# EAGLE board furby (EAGLE 6.3)
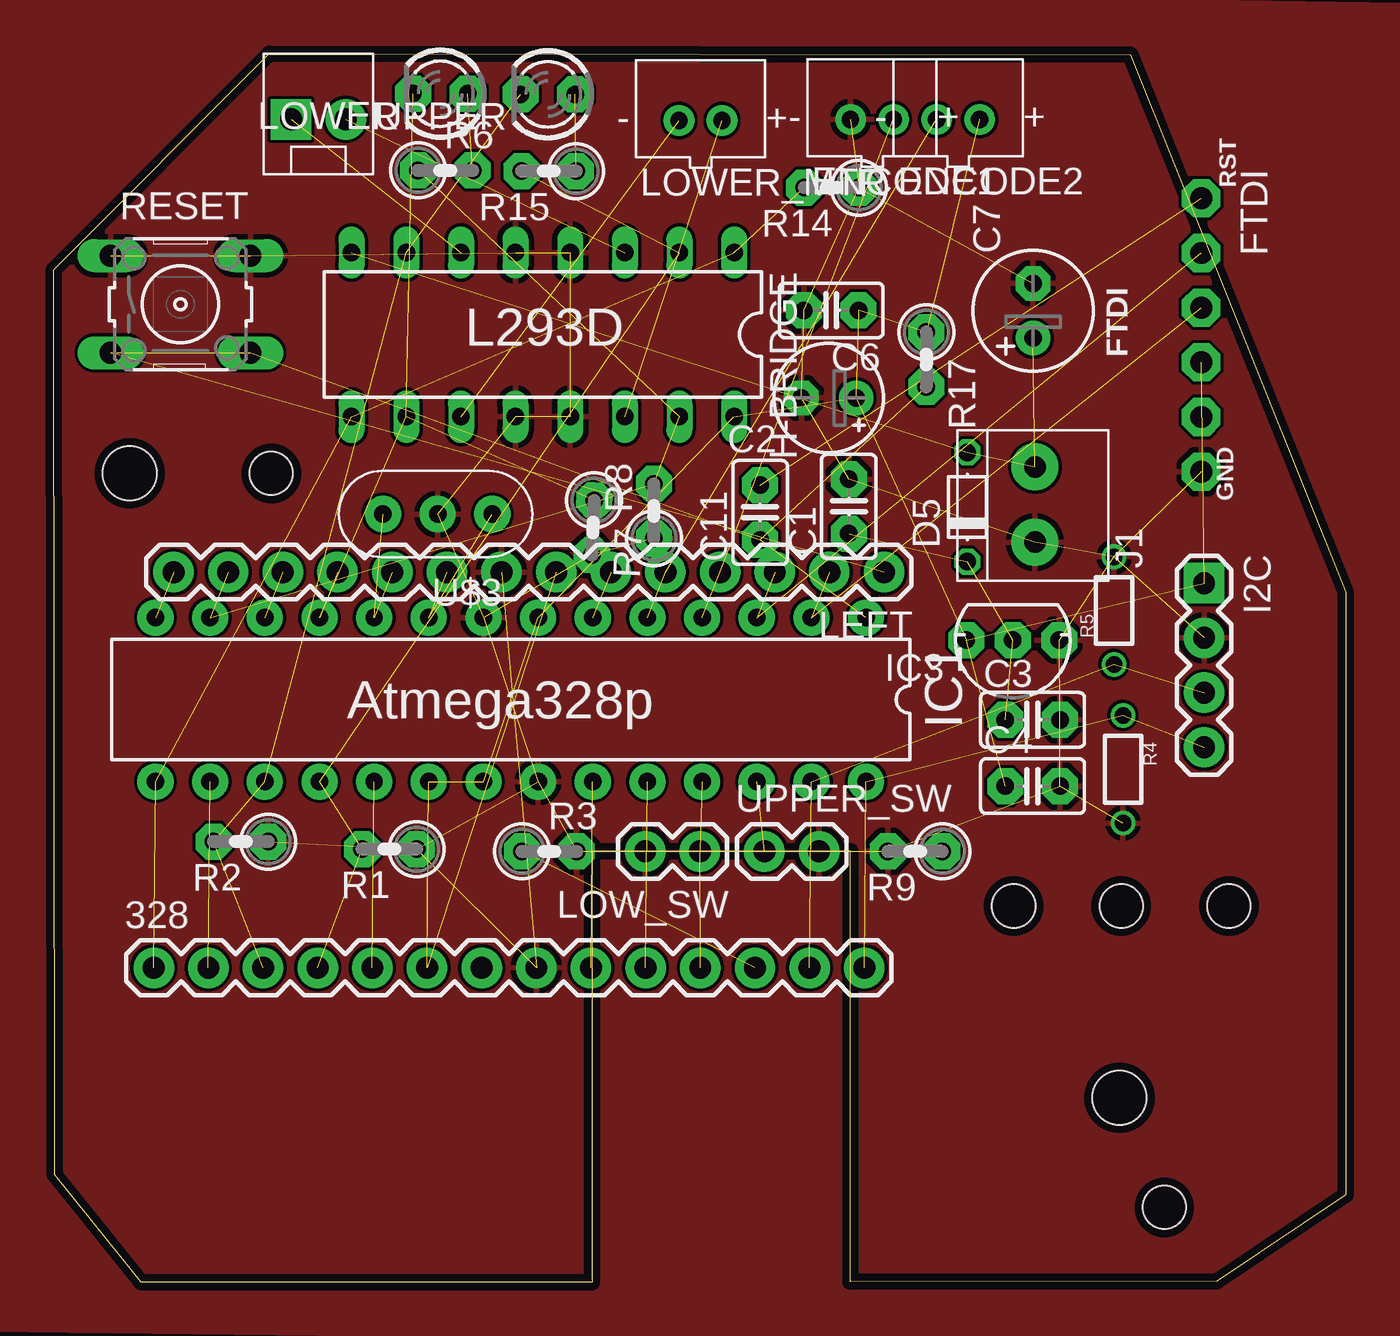
[diagram p0: board, top side]
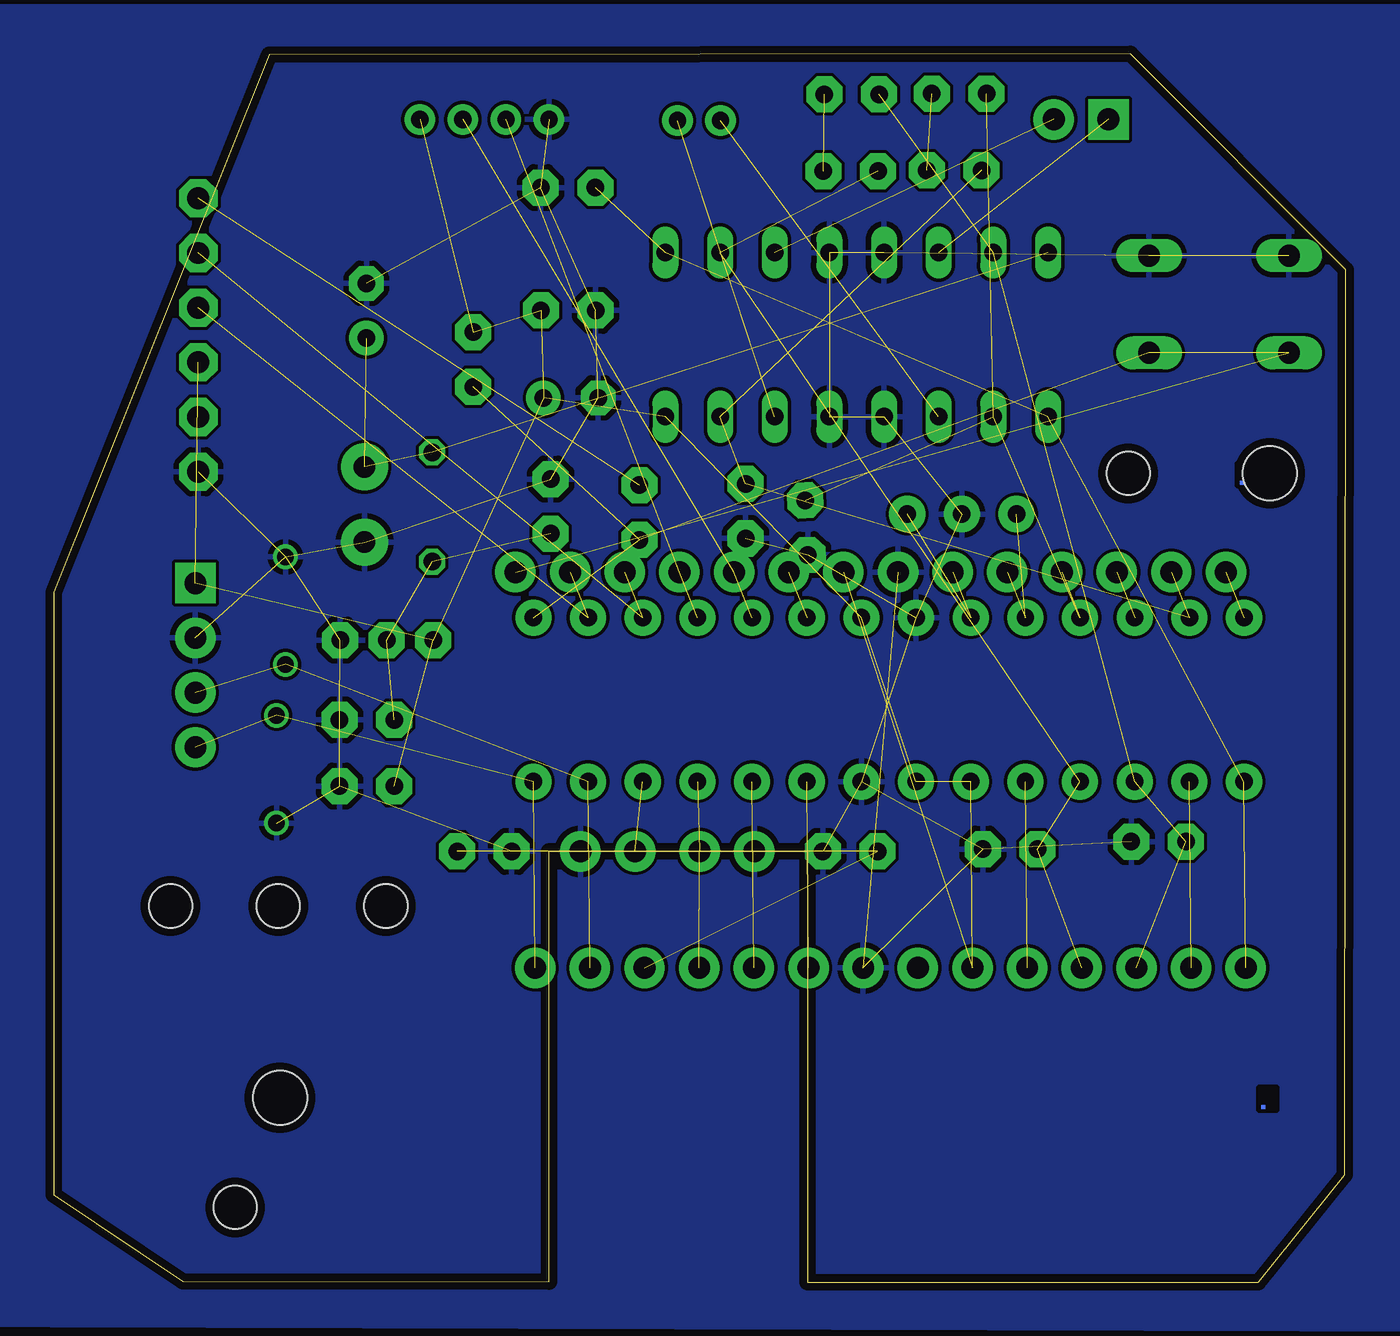
[diagram p1: board, bottom side, seen from below]

Size 60.03 x 57.06 mm. Coordinates in mm from the lower left corner, seen from the top.
Outline: 10.01,57.06 0,47.03 0.05,4.98 4.05,0 25.01,0 25.02,20.01 37.02,20.01 37.02,0.01 54.03,0.05 60.03,4.05 60.03,32.04 50.03,57.01 10,57.05
Copper layers (1*16): Top 0.0356mm / dielectric 1.5011mm / Bottom 0.0356mm
Design rules "LaenPCBOrder": minimum track width 6mil, minimum drill 13mil, track to track 6mil, track to pad 6mil, pad to pad 6mil, via to via 6mil, smd to smd 6mil, copper to edge 15mil, drill to drill 6mil, minimum pad ring 7mil, minimum via ring 7mil, stop-mask expansion 4mil, vias tented up to drill 0mil, thermal gap 10mil
Net classes: 1 power: width 0.61 mm
Holes 3.2 mm at 45.44,63.09 40.12,62.42
Holes 2 mm at 10.11,37.57 51.61,3.47 49.61,17.47 54.61,17.47 44.61,17.47
Holes 2.5 mm at 3.52,37.57 49.52,8.57

## Footprints (pad centres in the part's own frame; a part is rotated, then mirrored left to right if it is on the bottom)
1X14 = drill 1.016 pad 1.88: 1 0,0; 2 2.54,0; 3 5.08,0; 4 7.62,0; 5 10.16,0; 6 12.7,0; 7 15.24,0; 8 17.78,0; 9 20.32,0; 10 22.86,0; 11 25.4,0; 12 27.94,0; 13 30.48,0; 14 33.02,0
C025-025X050 = drill 0.813 pad 1.676 octagon: 1 -1.27,0; 2 1.27,0
E2,5-5 = drill 0.813 pad 1.6: + -1.27,0 | drill 0.813 pad 1.6 octagon: - 1.27,0
E2,5-6 = drill 0.813 pad 1.6: + -1.27,0 | drill 0.813 pad 1.6 octagon: - 1.27,0
D-5 = drill 0.813 octagon: A 2.54,0; C -2.54,0
JST-PH-2-THM = drill 0.8 pad 1.422: 1 1,0; 2 -1,0
1X06-CLEANBIG = drill 1.016 pad 1.778 octagon: 1 -6.35,0; 2 -3.81,0; 3 -1.27,0; 4 1.27,0; 5 3.81,0; 6 6.35,0
DIL16 = drill 0.813 long: 1 -8.89,-3.81; 2 -6.35,-3.81; 3 -3.81,-3.81; 4 -1.27,-3.81; 5 1.27,-3.81; 6 3.81,-3.81; 7 6.35,-3.81; 8 8.89,-3.81; 9 8.89,3.81; 10 6.35,3.81; 11 3.81,3.81; 12 1.27,3.81; 13 -1.27,3.81; 14 -3.81,3.81; 15 -6.35,3.81; 16 -8.89,3.81
1X04 = drill 1.016 pad 1.88 square: 1 0,0 | drill 1.016 pad 1.88: 2 2.54,0; 3 5.08,0; 4 7.62,0
DIL28-3-ROUND = drill 0.813 pad 1.676: 1 -16.51,-3.81; 2 -13.97,-3.81; 3 -11.43,-3.81; 4 -8.89,-3.81; 5 -6.35,-3.81; 6 -3.81,-3.81; 7 -1.27,-3.81; 8 1.27,-3.81; 9 3.81,-3.81; 10 6.35,-3.81; 11 8.89,-3.81; 12 11.43,-3.81; 13 13.97,-3.81; 14 16.51,-3.81; 15 16.51,3.81; 16 13.97,3.81; 17 11.43,3.81; 18 8.89,3.81; 19 6.35,3.81; 20 3.81,3.81; 21 1.27,3.81; 22 -1.27,3.81; 23 -3.81,3.81; 24 -6.35,3.81; 25 -8.89,3.81; 26 -11.43,3.81; 27 -13.97,3.81; 28 -16.51,3.81
TO92-INLINE = drill 0.813 pad 1.676 octagon: 1 -2.159,0; 2 0,0; 3 2.159,0
1X2-3.5MM = drill 1 pad 2.184: 1 1.8,0; 2 -1.7,0
1X02 = drill 1.016 pad 1.88: 1 0,0; 2 2.54,0
LED3MM = drill 0.813 pad 1.676 octagon: A -1.27,0; K 1.27,0
0207/2V = drill 0.813 pad 1.676 octagon: 1 -1.27,0; 2 1.27,0
1/6W-RES = drill 0.762: 1 -2.5,0; 2 2.5,0
B3F-10XX = drill 1.016 long: 1 -3.251,2.261; 2 3.251,2.261; 3 -3.251,-2.261; 4 3.251,-2.261
CERM_OSC = drill 0.813 pad 1.676: P$1 -2.54,0; P$2 0,0; P$3 2.54,0
MOLEX-1X2 = drill 1.016 pad 1.88 square: 1 0,0 | drill 1.016 pad 1.88: 2 2.54,0

## Placement (x,y rotation side)
328  M14  [1X14]  4.64,14.6 0 top
C1  0.1uF  [C025-025X050]  36.95,36.03 90 top
C2  100uF/6V  [E2,5-5]  36.01,41.08 180 top
C3  [C025-025X050]  45.48,26.12 0 top
C4  [C025-025X050]  45.48,23.04 0 top
C6  0.1uF  [C025-025X050]  36.12,45.14 180 top
C7  100uF/16V  [E2,5-6]  45.51,45.12 90 top
C11  0.1uF  [C025-025X050]  32.82,35.75 90 top
D5  [D-5]  42.45,36.01 90 top
ENCODE1  [JST-PH-2-THM]  38.02,54.01 0 top
ENCODE2  [JST-PH-2-THM]  42.02,54.01 0 top
FTDI  FTDI  [1X06-CLEANBIG]  53.32,44 270 top
H-BRIDGE  L293D  [DIL16]  22.73,44.01 180 top
I2C  [1X04]  53.46,32.47 270 top
IC1  ATMEGA168PROUND  [DIL28-3-ROUND]  21.23,27.06 180 top
IC3  [TO92-INLINE]  44.56,29.82 180 top
J1  1X2-3.5MM  [1X2-3.5MM]  45.59,36.17 270 top
LEFT  M14  [1X14]  38.58,32.98 180 top
LOW_SW  [1X02]  30.02,20.01 180 top
LOWER  [LED3MM]  17.96,55.2 180 top
LOWER_MTR  [JST-PH-2-THM]  30.05,53.96 0 top
R1  [0207/2V]  15.59,20.11 180 top
R2  [0207/2V]  8.69,20.46 180 top
R3  [0207/2V]  23.02,20.01 0 top
R4  [1/6W-RES]  49.68,23.83 270 top
R5  [1/6W-RES]  49.27,31.19 90 top
R6  [0207/2V]  18.19,51.64 0 top
R7  [0207/2V]  25.05,35.05 267.4 top
R8  [0207/2V]  27.89,35.81 90 top
R9  [0207/2V]  40.02,20.01 180 top
R14  [0207/2V]  36.14,50.85 180 top
R15  [0207/2V]  23,51.6 180 top
R17  [0207/2V]  40.55,42.86 270 top
RESET  [B3F-10XX]  5.89,45.42 0 top
U$3  [CERM_OSC]  17.84,35.68 180 top
UPPER  [LED3MM]  22.96,55.18 180 top
UPPER_MTR  [MOLEX-1X2]  11.02,54.01 0 top
UPPER_SW  [1X02]  33.02,20.01 0 top

## Library data of the parts
328 I2C LEFT LOW_SW R4 R5 UPPER_MTR UPPER_SW = SparkFun
C1 C11 LOWER UPPER = minimidi
C2 C6 C7 = rcl-ez
C3 C4 IC1 IC3 J1 R1-R3 R6-R9 R14 R15 R17 U$3 = adafruit
D5 = diode
ENCODE1 ENCODE2 LOWER_MTR = adafruit_mod
FTDI = carduino
H-BRIDGE = texas
RESET = switch-omron

## Nets
A0: 328.9 IC1.23
A1: 328.10 IC1.24
A2: 328.11 IC1.25 LOW_SW.1 R9.1
A3: 328.12 IC1.26 R3.1 UPPER_SW.1
A4_SDA: 328.13 I2C.3 IC1.27 R5.1
A5_SCL: 328.14 I2C.4 IC1.28 R4.1
AREF: 328.7
D0_RX: FTDI.3 IC1.2 LEFT.2
D1_TX: FTDI.2 IC1.3 LEFT.3
D2: ENCODE1.1 IC1.4 LEFT.4
D3: ENCODE2.2 IC1.5 LEFT.5
D4: IC1.6 LEFT.6
D5: H-BRIDGE.10 IC1.11 LEFT.11 LOWER.K R7.1
D6: IC1.12 LEFT.12
D7: H-BRIDGE.15 IC1.13 LEFT.13 R6.1 R8.2
D8_CLK: IC1.14 LEFT.14
D9: 328.1 H-BRIDGE.1 H-BRIDGE.9 IC1.15 R14.2
D10: 328.2 IC1.16
D11_MOSI: 328.3 H-BRIDGE.7 IC1.17 R2.2 UPPER.K
D12_MISO: 328.4 H-BRIDGE.2 IC1.18 R1.2 R15.2
D13: 328.5 IC1.19
GND [power]: 328.8 C1.2 C2.- C3.2 C4.2 C6.2 C7.- ENCODE1.2 FTDI.6 H-BRIDGE.4 H-BRIDGE.5 H-BRIDGE.12 H-BRIDGE.13 I2C.2 IC1.8 IC1.22 IC3.1 J1.1 LEFT.8 LOW_SW.2 R1.1 R2.1 R3.2 R4.2 R5.2 R7.2 R8.1 R9.2 R14.1 RESET.1 RESET.2 U$3.P$2 UPPER_SW.2
N$1: H-BRIDGE.11 LOWER_MTR.2
N$2: LOWER.A R6.2
N$9: R15.1 UPPER.A
N$22: H-BRIDGE.14 LOWER_MTR.1
N$24: C1.1 C3.1 D5.C IC3.2
N$25: H-BRIDGE.3 UPPER_MTR.2
N$28: H-BRIDGE.6 UPPER_MTR.1
RESET: C11.1 IC1.1 LEFT.1 R17.2 RESET.3 RESET.4
RTS#: C11.2 FTDI.1
V+: C7.+ D5.A H-BRIDGE.8 J1.2
VCC: 328.6 C2.+ C4.1 C6.1 ENCODE2.1 FTDI.4 H-BRIDGE.16 I2C.1 IC1.7 IC1.20 IC1.21 IC3.3 LEFT.7 R17.1
XTAL1: IC1.9 LEFT.9 U$3.P$1
XTAL2: IC1.10 LEFT.10 U$3.P$3

## Tracks (layer width: path | path; a pad name or v marks a point on that pad's centre or on a via)
A0  (1 unrouted)
A1  (1 unrouted)
A2  (3 unrouted)
A3  (3 unrouted)
A4_SDA  (3 unrouted)
A5_SCL  (3 unrouted)
D0_RX  (2 unrouted)
D1_TX  (2 unrouted)
D2  (2 unrouted)
D3  (2 unrouted)
D4  (1 unrouted)
D5  (4 unrouted)
D6  (1 unrouted)
D7  (4 unrouted)
D8_CLK  (1 unrouted)
D9  (4 unrouted)
D10  (1 unrouted)
D11_MOSI  (4 unrouted)
D12_MISO  (4 unrouted)
D13  (1 unrouted)
GND  (32 unrouted)
  pour Bottom: -4.2,59.25 68.6,59.26 67.49,-1.96 -5.13,-2.19
  pour Top: -3.14,60.35 68.58,59.22 68.26,-3.05 -3.19,-2.19
N$1  (1 unrouted)
N$2  (1 unrouted)
N$9  (1 unrouted)
N$22  (1 unrouted)
N$24  (3 unrouted)
N$25  (1 unrouted)
N$28  (1 unrouted)
RESET  (5 unrouted)
RTS#  (1 unrouted)
V+  (3 unrouted)
VCC  (13 unrouted)
XTAL1  (2 unrouted)
XTAL2  (2 unrouted)

## Text on the board
Bottom: . | . | .
tPlace: RST | FTDI | L293D | GND | I2C | Atmega328p
bDocu: Open Source / Hardware | i2c_motor_v2 Jan 2012 / Dawson-Station.blogspot.com / 648.ken@gmail.com